# Altium PCB IBMExtender.PcbDoc (part 3 of 3)
Units mm, origin at the board's own origin, x right, y up, seen from the top; angles counter-clockwise.
Board outline 203.2 x 105.41 mm, 4 copper layers (F.Cu, In1.Cu, In2.Cu, B.Cu); 44 components, 158 nets, 598 pads, 425 vias.
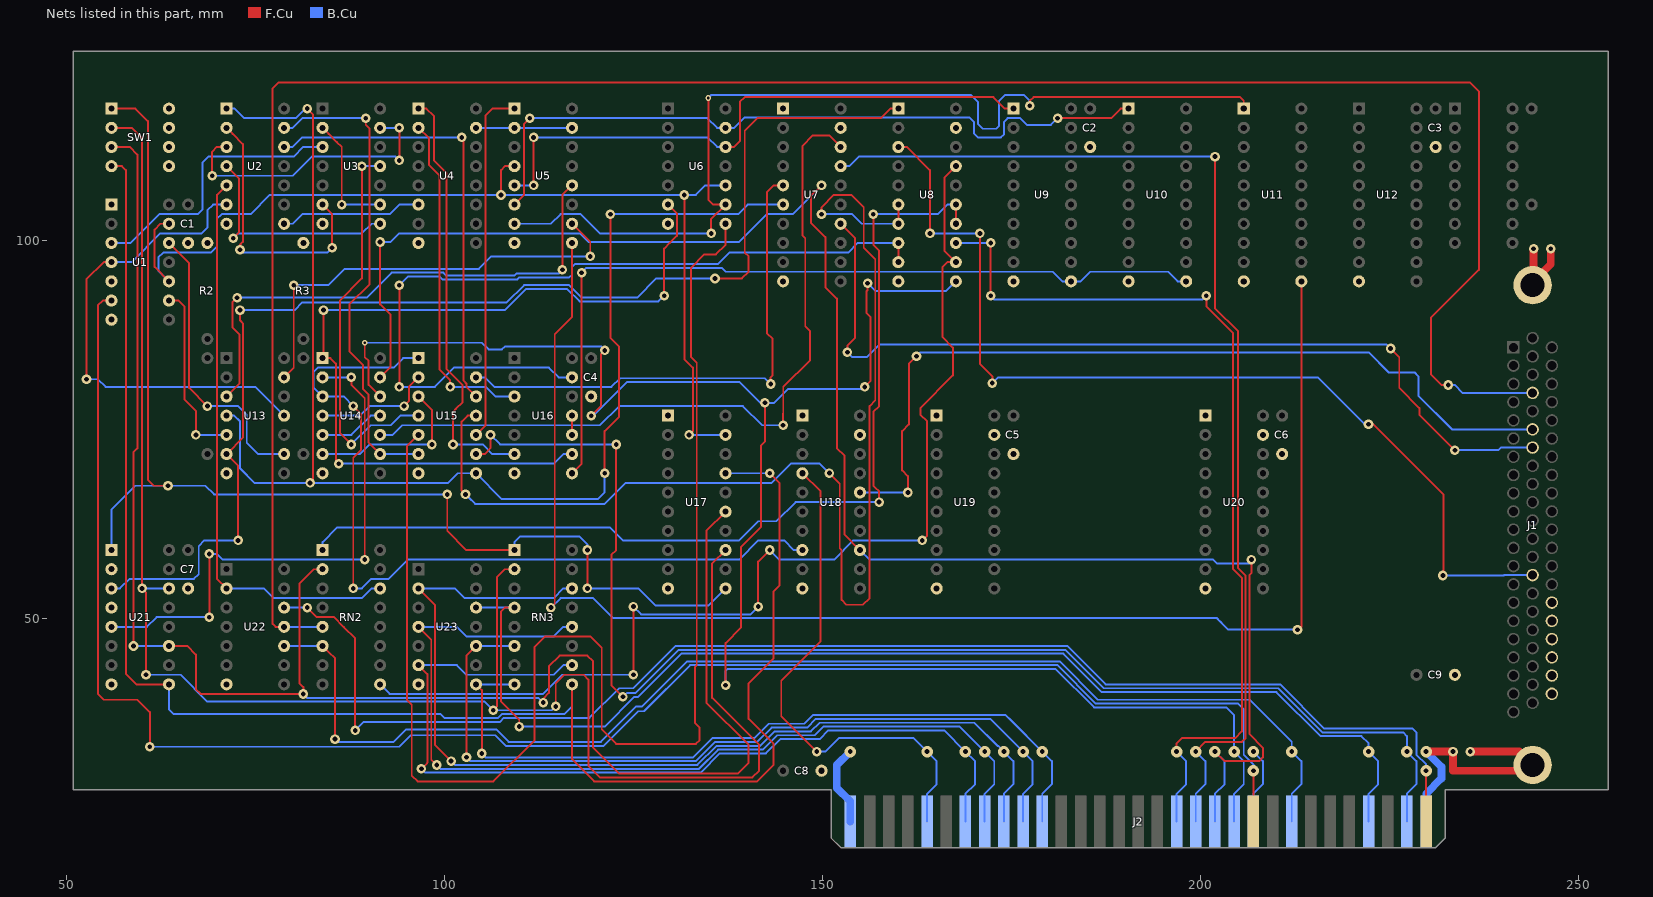
[diagram p5: the nets of this part, all layers, seen from the top]

## Via types
v1: diameter 1.27, hole 0.635, F.Cu to B.Cu, tented both sides, 360 vias
v2: diameter 1.524, hole 0.635, F.Cu to B.Cu, tented both sides, 62 vias
v3: diameter 0.762, hole 0.381, F.Cu to B.Cu, tented both sides, 3 vias

## Nets (pads, with @x,y where several pads share a name; then routed paths per layer and width w, separated by ;. In a path a pad name is that pad's centre, name@x,y a point inside that pad or via, vN(x,y) a via of type N, cw(c..) or ccw(c..) an arc to the next point about the centre after c; other vN are vias at no path point) (continued)
EMEMW#: J1.35 U8.3 | length 133.2
  F.Cu w0.254: U8.3@160.02,112.395 161.151,112.395 164.211,109.335 164.211,101.504 v1(164.211,100.965) ; v1(170.815,100.965) 170.815,83.702 171.227,83.29 172.466,82.051 v1(172.466,81.153) ; v1(222.25,75.692) 222.885,75.692 223.774,74.803 226.187,72.39 ; 224.409,74.168 226.187,72.39 ; v1(232.093,55.689) 232.093,56.228 232.156,56.292 232.156,66.421 226.187,72.39
  B.Cu w0.254: v1(164.211,100.965) 165.1,100.965 170.307,100.965 v1(170.815,100.965) ; v1(172.466,81.153) 173.228,81.915 ; v1@172.72,81.407 173.228,81.915 ; v1(222.25,75.692) 221.742,75.692 215.519,81.915 173.482,81.915 173.228,81.915 ; v1(232.093,55.689) 240.157,55.689 240.195,55.728 J1.35@243.967,55.728
ERESERVED: J1.25 RN2.5 U22.11 | length 292.5
  F.Cu w0.254: U22.11@78.74,48.895 77.609,48.895 77.216,49.288 77.216,120.142 77.978,120.904 235.712,120.904 236.855,119.761 236.855,96.139 230.505,89.789 230.505,82.296 231.902,80.899 v1(232.791,80.899)
  B.Cu w0.254: U22.11@78.74,48.895 RN2.5@83.82,48.895 ; v1(232.791,80.899) 233.68,80.899 234.747,79.832 J1.25@243.84,79.832
ERESET#: J1.28 U7.14 | length 119
  F.Cu w0.254: U7.14@152.4,102.235 154.305,100.33 154.305,87.249 154.305,87.131 153.289,86.115 v1(153.289,85.217) ; v1(225.171,85.725) 226.314,84.582 226.314,84.201 226.314,80.518 228.981,77.851 228.981,76.962 v1(233.68,72.263)
  B.Cu w0.254: v1(153.289,85.217) 153.924,84.582 154.305,84.582 155.829,84.582 157.48,86.233 223.52,86.233 ; 223.774,86.233 223.52,86.233 ; v1(225.171,85.725) 224.663,86.233 224.282,86.233 223.52,86.233 ; v1(233.68,72.263) 233.731,72.314 239.471,72.314 239.789,72.631 242.787,72.631 242.8,72.619 J1.28@243.967,72.619
ET/C: J1.27 U18.16 | length 112.8
  F.Cu w0.254: v1(161.29,66.675) 161.29,68.834 160.528,69.596 160.528,74.803 161.417,75.692 161.417,81.407 161.417,83.693 161.798,84.074 v1(162.433,84.709)
  B.Cu w0.254: U18.16@154.94,66.675 v1(161.29,66.675) ; v1(162.433,84.709) 162.941,85.217 222.25,85.217 224.917,82.55 228.346,82.55 228.854,82.042 228.854,79.477 233.325,75.006 J1.27@243.84,75.006
EXT_DISABLE: U8.1 U13.6 U21.3 | length 164.9
  F.Cu w0.254: v1(72.644,60.325) 72.644,70.231 72.517,70.358 U13.6@71.12,71.755 73.317,73.952 73.317,89.027 72.898,89.446 72.898,89.907 v1(72.898,90.805) ; v1(135.763,94.996) 139.319,94.996 140.208,95.885 140.208,97.917 139.7,98.425 139.7,114.554 141.351,116.205 157.696,116.205 158.966,117.475 U8.1@160.02,117.475
  B.Cu w0.254: U21.3@55.88,53.975 57.011,53.975 58.281,55.245 66.802,55.245 67.437,55.88 67.437,59.563 68.199,60.325 71.374,60.325 v1(72.644,60.325) ; v1(72.898,90.805) 80.137,90.805 81.153,91.821 108.204,91.821 110.49,94.107 116.459,94.107 118.11,92.456 125.476,92.456 128.016,94.996 v1(135.763,94.996)
GND: C1.2 C2.2 C3.2 C4.2 C5.2 C6.2 C7.2 C8.2 C9.2 J1.57 J1.58 J1.59 J1.60 J1.61 J1.62 J1.63 J2.1 J2.10 J2.31 R2.2 R3.2 SW1.5 SW1.6 SW1.7 SW1.8 U1.1 U1.5 U1.7 U2.7 U3.7 U4.8 U5.8 U6.7 U7.1 U7.10 U7.19 U8.10 U8.19 U9.10 U10.10 U11.10 U12.10 U13.7 U14.7 U15.7 U16.7 U17.1 U17.10 U18.1 U18.10 U18.19 U19.1 U19.10 U19.19 U20.1 U20.10 U20.19 U21.2 U21.4 U21.8 U22.7 U23.7 | length 68.7
  F.Cu w1.016: v2(229.87,32.385) v1(233.426,32.385) 233.426,29.845 243.205,29.845 J1.63@243.967,30.607 242.189,32.385 v1(235.712,32.385) ; v1(244.094,98.933) 244.094,94.234 J1.63@243.967,94.107 243.967,94.488 246.38,96.901 v1(246.38,98.933)
  B.Cu w0.254: J2.10@207.01,23.114 207.01,26.793 208.28,28.063 208.28,31.115 v2(207.01,32.385)
  B.Cu w1.016: J2.31@153.67,23.114 153.67,25.781 151.892,27.559 151.892,30.607 v2(153.67,32.385) ; J2.1@229.87,23.114 229.87,26.797 231.902,28.829 231.902,30.353 v2(229.87,32.385)
IOCHCK: J2.32 U22.12 | length 186.2
  F.Cu w0.254: v1(81.788,51.435) 83.058,50.165 85.344,50.165 86.645,48.864 88.138,47.371 v1(88.138,35.179) ; J2.32@229.87,23.114 v2(229.87,29.845)
  B.Cu w0.254: U22.12@78.74,51.435 v1(81.788,51.435) ; 88.646,35.687 v1(88.138,35.179) 89.281,36.322 107.315,36.322 107.823,36.83 115.316,36.83 119.126,36.83 123.063,40.767 124.968,40.767 130.556,46.355 182.372,46.355 187.452,41.275 210.566,41.275 216.408,35.433 228.092,35.433 228.6,34.925 228.6,31.963 229.87,30.693 v2(229.87,29.845)
IOCHRDY: J2.41 U1.6 | length 234.1
  F.Cu w0.254: U1.6@55.88,92.075 54.749,92.075 54.102,91.428 54.102,40.005 54.864,39.243 59.309,39.243 60.96,37.592 v1(60.96,33.02) ; J2.41@207.01,23.114 v2(207.01,29.845)
  B.Cu w0.254: v1(60.96,33.02) 93.98,33.02 95.504,34.544 106.68,34.544 108.077,33.147 121.031,33.147 125.603,37.719 126.365,37.719 132.461,43.815 143.3,43.815 143.763,43.815 181.102,43.815 186.182,38.735 204.978,38.735 205.74,37.973 205.74,31.963 207.01,30.693 v2(207.01,29.845)
IOR#: J2.14 U8.13 | length 122.4
  F.Cu w0.254: v1@172.212,99.695 v1(172.243,99.695) v1(172.243,92.71) ; v2(196.85,32.385) 196.85,33.463 197.55,34.163 204.597,34.163 205.486,35.052 205.486,55.372 204.343,56.515 204.343,87.757 202.057,90.043 ; v1@200.787,92.583 200.787,91.948 ; v1(200.787,92.71) 200.787,91.948 ; 201.422,90.678 202.057,90.043 ; 200.787,91.948 200.787,91.313 202.057,90.043
  B.Cu w0.254: U8.13@167.64,99.695 v1@172.212,99.695 ; v1@172.212,92.71 v1(172.243,92.71) 172.72,92.202 198.374,92.202 199.644,92.202 200.279,92.202 v1(200.787,92.71) ; J2.14@196.85,23.114 196.85,26.793 198.12,28.063 198.12,31.115 v2(196.85,32.385)
IOW#: J2.13 U7.17 | length 146.4
  F.Cu w0.254: v2(199.39,32.385) 200.66,33.655 205.486,33.655 205.994,34.163 205.994,55.626 204.978,56.642 204.978,88.011 201.93,91.059 v1(201.93,111.125)
  B.Cu w0.254: U7.17@152.4,109.855 153.531,109.855 154.801,111.125 v1(201.93,111.125) ; J2.13@199.39,23.114 199.39,26.793 200.66,28.063 200.66,31.115 v2(199.39,32.385)
IRQ2: J2.4 RN3.4 U23.12 | length 156
  F.Cu w0.254: RN3.4@109.22,51.435 107.95,51.435 107.442,50.927 107.442,38.989 109.855,36.576 109.855,36.585 v1(109.855,35.687)
  B.Cu w0.254: U23.12@104.14,51.435 105.271,51.435 RN3.4@109.22,51.435 ; v1(109.855,35.687) 121.031,35.687 121.138,35.687 125.075,39.624 125.603,39.624 131.318,45.339 181.864,45.339 186.944,40.259 210.058,40.259 215.9,34.417 221.296,34.417 222.25,33.463 v2(222.25,32.385) 223.52,31.115 223.52,28.063 222.25,26.793 J2.4@222.25,23.114
IRQ3: J2.25 RN3.10 U23.6 | length 122.6
  F.Cu w0.254: U23.6@96.52,43.815 97.701,42.634 97.701,30.899 97.663,30.861 v1(96.901,30.099)
  B.Cu w0.254: U23.6@96.52,43.815 101.6,43.815 102.87,42.545 114.439,42.545 115.709,43.815 RN3.10@116.84,43.815 ; v1@97.282,29.718 v1(96.901,30.099) 97.409,29.591 98.425,29.591 ; 98.596,29.591 98.425,29.591 ; 152.446,35.179 150.749,35.179 149.606,34.036 149.182,34.036 144.399,34.036 142.494,32.131 140.462,32.131 136.394,32.131 133.854,29.591 98.85,29.591 98.425,29.591 ; 152.446,35.179 166.116,35.179 v2(168.91,32.385) 170.18,31.115 170.18,28.063 168.91,26.793 J2.25@168.91,23.114
IRQ4: J2.24 RN3.12 U23.4 | length 127.4
  F.Cu w0.254: U23.4@96.52,48.895 98.171,47.244 98.209,47.206 98.209,31.331 v1(98.933,30.607)
  B.Cu w0.254: U23.4@96.52,48.895 101.6,48.895 102.87,47.625 112.268,47.625 114.439,47.625 115.709,48.895 RN3.12@116.84,48.895 ; v1(98.933,30.607) 99.441,30.099 133.644,30.099 136.184,32.639 140.252,32.639 142.113,32.639 144.018,34.544 148.971,34.544 150.114,35.687 152.236,35.687 ; 152.236,35.687 168.148,35.687 v2(171.45,32.385) 172.72,31.115 172.72,28.063 171.45,26.793 J2.24@171.45,23.114
IRQ5: J2.23 RN3.14 U23.2 | length 133.6
  F.Cu w0.254: U23.2@96.52,53.975 98.552,51.943 98.717,51.778 98.717,33.236 v1(100.838,31.115)
  B.Cu w0.254: U23.2@96.52,53.975 101.346,53.975 102.616,52.705 110.998,52.705 114.439,52.705 115.709,53.975 RN3.14@116.84,53.975 ; v1(100.838,31.115) 101.346,30.607 133.433,30.607 135.973,33.147 141.732,33.147 143.637,35.052 148.463,35.052 149.606,36.195 152.025,36.195 170.101,36.195 173.149,33.147 173.228,33.147 v2(173.99,32.385) 175.26,31.115 175.26,28.063 173.99,26.793 J2.23@173.99,23.114
IRQ6: J2.22 RN3.6 U23.10 | length 108.8
  F.Cu w0.254: v1(102.87,31.623) 102.87,45.085 103.251,45.466 U23.10@104.14,46.355
  B.Cu w0.254: v1(102.87,31.623) 103.378,31.115 133.223,31.115 135.763,33.655 141.351,33.655 143.256,35.56 147.955,35.56 149.098,36.703 149.606,36.703 ; U23.10@104.14,46.355 105.271,46.355 RN3.6@109.22,46.355 ; 149.401,36.703 149.606,36.703 ; 151.765,36.703 149.606,36.703 ; 151.815,36.703 172.212,36.703 v2(176.53,32.385) 177.8,31.115 177.8,28.063 176.53,26.793 J2.22@176.53,23.114
IRQ7: J2.21 RN3.8 U23.8 | length 111.7
  F.Cu w0.254: U23.8@104.14,41.275 104.902,40.513 v1(104.902,32.131)
  B.Cu w0.254: U23.8@104.14,41.275 108.089,41.275 RN3.8@109.22,41.275 ; v1(104.902,32.131) 105.41,31.623 132.461,31.623 132.882,31.623 133.136,31.877 ; 132.969,31.71 133.136,31.877 ; 151.604,37.211 148.696,37.211 147.554,36.068 142.875,36.068 140.97,34.163 135.422,34.163 133.136,31.877 ; 151.605,37.211 174.244,37.211 ; J2.21@179.07,23.114 179.07,26.797 180.34,28.067 180.34,31.115 v2(179.07,32.385) ; 174.244,37.211 175.006,36.449 ; 174.244,37.211 175.006,36.449 ; 174.244,37.211 v2(179.07,32.385) ; 175.006,36.449 v2(179.07,32.385)
LOCAL_DIR: U6.8 U15.5 | length 183.9
  F.Cu w0.254: U15.5@96.52,74.295 94.996,72.771 94.996,39.243 95.631,38.608 95.631,29.21 96.393,28.448 106.426,28.448 111.887,33.909 111.887,46.228 113.284,47.625 115.316,47.625 ; 115.189,47.625 115.316,47.625 ; U6.8@137.16,102.235 137.16,99.441 135.89,98.171 134.366,98.171 132.588,96.393 132.588,84.582 133.35,83.82 133.35,74.783 133.35,71.247 133.35,43.811 133.096,43.557 133.096,36.195 133.731,35.56 133.731,33.909 133.223,33.401 122.682,33.401 120.777,35.306 120.777,46.101 119.253,47.625 115.316,47.625
MEM_IN_EXP: U14.3 U15.1 U18.8 | length 110.8
  F.Cu w0.254: v1(87.884,53.975) 87.884,54.737 ; 87.884,54.61 87.884,54.737 ; v1(87.884,78.105) 88.9,77.089 88.9,72.263 87.884,71.247 87.884,54.737
  B.Cu w0.254: 86.487,79.375 86.36,79.375 ; v1(87.884,53.975) 88.519,53.975 89.027,53.975 90.297,55.245 92.583,55.245 95.123,57.785 138.938,57.785 141.478,60.325 144.919,60.325 146.189,59.055 U18.8@147.32,59.055 ; v1(87.884,78.105) 86.614,79.375 86.36,79.375 ; U15.1@96.52,84.455 94.488,84.455 93.218,83.185 83.185,83.185 82.639,82.639 82.639,80.556 U14.3@83.82,79.375 86.36,79.375
MEMR#: J2.12 U14.13 U18.13 | length 230.5
  F.Cu w0.254: U14.13@91.44,81.915 92.837,83.312 92.837,90.17 91.44,91.567 v1(91.44,99.822) ; v1(149.86,107.315) 148.463,105.918 148.463,102.362 150.368,100.457 150.368,93.853 151.892,92.329 151.892,72.517 152.908,71.501 152.908,61.087 U18.13@154.94,59.055 ; v2(201.93,32.385) 203.2,31.115 207.772,31.115 208.28,31.623 208.28,32.893 206.502,34.671 206.502,55.753 206.756,56.007 v1(206.756,57.785)
  B.Cu w0.254: v1(91.44,99.822) 92.837,99.822 93.98,100.965 100.584,100.965 ; 100.711,100.965 100.584,100.965 ; v1(149.86,107.315) 146.05,103.505 142.621,103.505 138.938,99.822 118.999,99.822 117.856,100.965 100.584,100.965 ; U18.13@154.94,59.055 156.21,57.785 201.676,57.785 202.184,57.277 206.502,57.277 206.756,57.531 v1(206.756,57.785) ; J2.12@201.93,23.114 201.93,26.793 203.2,28.063 203.2,31.115 v2(201.93,32.385)
MEMW#: J2.11 U8.11 U14.12 | length 246.6
  F.Cu w0.254: v3(89.408,86.487) 89.408,84.582 89.916,84.074 89.916,80.899 U14.12@91.44,79.375 ; v1(119.38,76.835) 120.65,78.105 120.65,84.963 v1(121.158,85.471) v1@121.158,85.598 ; v1(137.16,41.148) 137.16,46.736 139.192,48.768 139.192,59.436 141.859,62.103 141.859,72.898 142.367,73.406 142.367,77.089 ; 142.367,77.343 142.367,77.089 ; v1(142.367,78.537) 142.367,77.495 142.367,77.089 ; v1(155.575,80.645) 156.337,81.407 156.337,89.916 155.829,90.424 155.829,93.336 155.956,93.463 v1(155.956,94.361)
  B.Cu w0.254: v3(89.408,86.487) 96.647,86.487 ; 96.52,86.487 96.647,86.487 ; v1(119.38,76.835) 119.634,76.835 124.079,81.28 139.031,81.28 141.774,78.537 142.672,78.537 143.57,78.537 ; v1@121.158,85.598 120.777,85.979 107.95,85.979 107.569,85.598 105.791,85.598 104.902,86.487 96.647,86.487 ; v1(137.16,41.148) 137.16,42.164 137.16,43.053 137.414,43.307 142.367,43.307 ; 141.859,43.307 142.367,43.307 ; v1(142.367,78.537) 143.57,78.537 ; 144.145,43.307 144.399,43.307 ; 145.034,43.307 145.923,43.307 ; v1(155.575,80.645) 155.321,80.391 145.424,80.391 143.57,78.537 ; v1(155.956,94.361) 156.972,93.345 166.37,93.345 U8.11@167.64,94.615 ; J2.11@204.47,23.114 204.47,26.793 205.74,28.063 205.74,31.115 v2(204.47,32.385) 204.47,37.211 203.454,38.227 185.928,38.227 180.848,43.307 145.923,43.307 ; 142.367,43.307 143.09,43.307 143.762,43.307 144.399,43.307 ; 144.399,43.307 145.923,43.307
Net-(RN2-Pad1): RN2.1 U8.14 U8.15 | length 131.5
  F.Cu w0.254: v1(156.718,103.505) 156.718,99.441 157.48,98.679 157.48,78.105 156.718,77.343 156.718,67.564 156.972,67.31 157.48,66.802 v1(157.48,65.405) ; U8.14@167.64,102.235 167.64,103.366 U8.15@167.64,104.775
  B.Cu w0.254: RN2.1@83.82,59.055 83.82,60.109 85.725,62.014 121.882,62.014 123.571,60.325 132.842,60.325 ; 132.969,60.325 132.842,60.325 ; v1(156.718,103.505) 165.239,103.505 166.509,104.775 U8.15@167.64,104.775 ; v1(157.48,65.405) 156.972,65.405 146.431,65.405 143.891,62.865 141.478,62.865 138.938,60.325 132.842,60.325
Net-(RN2-Pad2): RN2.2 SW1.3 U17.15 U21.11 | length 231
  F.Cu w0.254: SW1.3@55.88,112.395 58.293,112.395 59.309,111.379 59.309,72.517 58.801,72.009 58.801,70.485 ; v1(58.801,46.355) 58.801,49.784 58.801,70.485 ; 58.801,71.247 58.801,70.485 ; U21.11@63.5,46.355 65.913,46.355 67.056,45.212 67.056,40.64 67.691,40.005 v1(81.28,40.005) 81.28,40.903 80.772,41.411 80.772,54.598 82.689,56.515 RN2.2@83.82,56.515 ; v1(113.03,38.862) 113.03,39.379 113.792,40.141 113.792,43.688 115.189,45.085 118.872,45.085 119.634,44.323 119.634,32.893 123.063,29.464 138.791,29.464 140.208,30.881 140.208,33.274 134.62,38.862 134.62,61.595 U17.15@137.16,64.135
  B.Cu w0.254: v1(58.801,46.355) 58.928,46.355 U21.11@63.5,46.355 ; v1(81.28,40.005) 81.788,39.497 112.014,39.497 112.395,39.497 v1(113.03,38.862)
Net-(RN2-Pad9): RN2.9 U8.12 U8.17 | length 150.1
  F.Cu w0.254: v1(124.968,42.545) 124.968,50.029 ; 124.968,50.927 124.968,50.029 ; v1(124.968,51.562) 124.968,50.029 ; v1(141.478,51.562) 141.478,52.324 ; v1@141.478,51.943 141.478,52.324 ; v1(143.002,59.055) 141.478,57.531 141.478,52.324 ; v1(163.195,60.325) 163.83,60.96 163.83,61.214 163.83,76.073 162.941,76.962 162.941,77.851 167.259,82.169 167.259,85.852 165.862,87.249 165.862,96.508 166.509,97.155 U8.12@167.64,97.155 166.116,98.679 166.116,108.331 166.37,108.585 U8.17@167.64,109.855
  B.Cu w0.254: RN2.9@91.44,41.275 92.71,40.005 113.03,40.005 115.57,42.545 122.936,42.545 v1(124.968,42.545) ; v1(124.968,51.562) 125.984,50.546 127.552,50.546 139.827,50.546 140.462,50.546 v1(141.478,51.562) ; v1(143.002,59.055) 144.272,57.785 151.511,57.785 154.051,60.325 154.462,60.325 160.655,60.325 ; v1@162.941,60.325 160.655,60.325 ; v1(163.195,60.325) 160.655,60.325
Net-(RN2-Pad14): RN2.14 U2.5 U22.2 | length 75.8
  F.Cu w0.254: U22.2@71.12,53.975 69.85,55.245 69.85,106.045 69.939,106.134 U2.5@71.12,107.315
  B.Cu w0.254: U22.2@71.12,53.975 76.073,53.975 77.343,52.705 89.039,52.705 90.309,53.975 RN2.14@91.44,53.975
Net-(RN3-Pad1): RN3.1 SW1.1 U17.11 U21.1 | length 160.3
  F.Cu w0.254: SW1.1@55.88,117.475 59.055,117.475 60.706,115.824 60.706,68.326 61.468,67.564 v1(63.373,67.564) ; v1@100.33,66.04 100.33,65.532 ; v1(100.33,66.421) 100.33,65.532 ; RN3.1@109.22,59.055 102.87,59.055 100.33,61.595 100.33,65.532 ; v1(118.872,53.975) v1(118.872,59.055)
  B.Cu w0.254: U21.1@55.88,59.055 55.88,64.389 59.055,67.564 v1(63.373,67.564) 68.326,67.564 69.469,66.421 v1(100.33,66.421) ; RN3.1@109.22,59.055 109.22,60.109 109.944,60.833 117.856,60.833 118.872,59.817 v1(118.872,59.055) ; v1(118.872,53.975) 125.603,53.975 127.889,51.689 134.874,51.689 U17.11@137.16,53.975
Net-(RN3-Pad2): RN3.2 SW1.2 U17.13 U21.14 | length 232.8
  F.Cu w0.254: SW1.2@55.88,114.935 58.547,114.935 59.944,113.538 59.944,112.002 59.944,57.658 ; 59.944,57.531 59.944,57.658 ; v1(60.452,42.545) 60.452,53.467 v1(59.944,53.975) 59.944,57.658 ; v1(106.426,37.846) 106.934,38.354 106.934,39.506 106.934,40.513 106.934,55.499 107.95,56.515 RN3.2@109.22,56.515 ; v1(114.681,38.354) 114.681,41.402 115.824,42.545 118.364,42.545 118.999,41.91 118.999,30.48 120.523,28.956 140.716,28.956 141.605,29.845 141.605,33.274 135.382,39.497 135.382,57.277 U17.13@137.16,59.055
  B.Cu w0.254: v1(59.944,53.975) U21.14@63.5,53.975 ; v1(60.452,42.545) 65.024,42.545 68.58,38.989 103.759,38.989 105.283,38.989 v1(106.426,37.846) 108.204,37.846 ; 107.578,37.846 108.204,37.846 ; v1(114.681,38.354) 114.173,37.846 113.792,37.846 108.204,37.846
Net-(RN3-Pad9): RN3.9 SW1.4 U17.17 U21.9 | length 223.2
  F.Cu w0.254: SW1.4@55.88,109.855 57.277,109.855 57.785,109.347 57.785,42.672 59.182,41.275 U21.9@63.5,41.275 ; RN3.9@116.84,41.275 116.84,31.369 119.761,28.448 139.319,28.448 141.351,28.448 143.51,30.607 143.51,33.401 140.208,36.703 140.208,41.402 143.51,44.704 143.51,53.594 144.272,54.356 144.272,65.278 ; v1(143.002,69.215) 144.272,67.945 144.272,65.278 ; 144.272,65.913 144.272,65.278
  B.Cu w0.254: U21.9@63.5,41.275 63.5,39.624 63.5,37.973 64.135,37.338 99.441,37.338 99.949,36.83 107.061,36.83 107.569,37.338 115.824,37.338 116.84,38.354 RN3.9@116.84,41.275 ; U17.17@137.16,69.215 142.113,69.215 ; 142.24,69.215 142.113,69.215 ; v1(143.002,69.215) 142.113,69.215
Net-(U1-Pad3): U1.3 U3.3 | length 36.8
  B.Cu w0.254: U1.3@55.88,99.695 58.42,99.695 62.23,103.505 67.31,103.505 67.945,104.14 67.945,110.363 68.707,111.125 80.01,111.125 81.28,112.395 U3.3@83.82,112.395
Net-(U1-Pad4): U1.4 U2.6 U13.11 | length 65.4
  F.Cu w0.254: v1(52.578,81.661) 52.578,94.869 54.864,97.155 U1.4@55.88,97.155
  B.Cu w0.254: v1(52.578,81.661) 54.102,81.661 55.118,80.645 59.69,80.645 74.93,80.645 U13.11@78.74,76.835 ; U1.4@55.88,97.155 58.547,97.155 62.357,100.965 67.818,100.965 68.58,101.727 68.58,104.013 69.342,104.775 U2.6@71.12,104.775
Net-(U1-Pad9): U1.9 U13.5 | length 24.1
  F.Cu w0.254: U1.9@63.5,92.075 64.77,92.075 65.532,91.313 65.532,78.994 67.056,77.47 v1(67.056,74.295)
  B.Cu w0.254: v1(67.056,74.295) 67.564,74.295 69.989,74.295 U13.5@71.12,74.295
Net-(U1-Pad12): U1.12 U13.9 | length 39.4
  F.Cu w0.254: U1.12@63.5,99.695 66.167,97.028 66.167,80.518 v1(68.58,78.105)
  B.Cu w0.254: v1(68.58,78.105) 69.596,78.105 ; v1@68.834,78.105 69.596,78.105 ; U13.9@78.74,71.755 75.311,71.755 73.787,73.279 73.787,76.962 72.644,78.105 71.12,78.105 69.596,78.105
Net-(U2-Pad2): U2.2 U3.6 | length 37.2
  F.Cu w0.254: U2.2@71.12,114.935 71.92,114.135 73.279,112.776 73.279,99.822 72.898,99.441 v1(72.898,98.806) ; U3.6@83.82,104.775 85.09,103.505 85.09,99.441 v1(85.09,99.06)
  B.Cu w0.254: v1(72.898,98.806) 73.279,98.425 74.295,98.425 ; 73.914,98.425 74.295,98.425 ; 74.676,98.425 75.184,98.425 ; 84.201,98.425 83.947,98.425 ; v1(85.09,99.06) 84.455,98.425 83.947,98.425 ; 74.295,98.425 75.184,98.425 ; 75.184,98.425 83.947,98.425
Net-(U2-Pad3): U2.3 U3.13 | length 39.5
  F.Cu w0.254: v1(69.215,108.585) 69.215,111.76 69.85,112.395 U2.3@71.12,112.395 ; v1(93.98,110.617) v1(93.98,114.935)
  B.Cu w0.254: v1(69.215,108.585) 78.232,108.585 79.883,108.585 82.423,111.125 92.329,111.125 ; U3.13@91.44,114.935 92.964,114.935 ; 92.964,111.125 92.71,111.125 92.329,111.125 ; v1@93.599,114.935 92.964,114.935 ; v1(93.98,110.617) 93.472,111.125 92.329,111.125 ; v1(93.98,114.935) 92.964,114.935
Net-(U2-Pad4): U2.4 U3.8 | length 30.7
  F.Cu w0.254: U2.4@71.12,109.855 72.771,108.204 72.771,101.092 v1(72.009,100.33)
  B.Cu w0.254: v1(72.009,100.33) 72.644,100.965 76.708,100.965 89.039,100.965 90.309,102.235 U3.8@91.44,102.235
Net-(U2-Pad8): U2.8 U4.6 | length 18.8
  B.Cu w0.254: U2.8@78.74,102.235 79.871,102.235 81.141,103.505 92.71,103.505 93.98,104.775 U4.6@96.52,104.775
Net-(U3-Pad2): U3.2 U3.9 | length 16.3
  F.Cu w0.254: U3.2@83.82,114.935 84.62,114.135 85.725,113.03 86.36,112.395 v1(86.36,104.775)
  B.Cu w0.254: v1(86.36,104.775) U3.9@91.44,104.775
Net-(U4-Pad15): U4.15 U5.2 U5.15 | length 12.7
  B.Cu w0.254: U4.15@104.14,114.935 U5.2@109.22,114.935 U5.15@116.84,114.935
Net-(U5-Pad5): U5.5 U6.12 U9.1 | length 79.8
  F.Cu w0.254: v1(111.76,107.315) 111.76,108.213 v1(111.76,113.665) ; U6.12@137.16,112.395 138.291,112.395 139.065,113.169 139.065,118.364 139.7,118.999 172.593,118.999 174.117,117.475 U9.1@175.26,117.475
  B.Cu w0.254: U5.5@109.22,107.315 v1(111.76,107.315) ; v1(111.76,113.665) 112.776,113.665 ; v1@112.268,113.665 112.776,113.665 ; U6.12@137.16,112.395 136.029,112.395 134.759,113.665 112.903,113.665 112.776,113.665
Net-(U10-Pad1): U5.6 U6.13 U10.1 | length 99.7
  F.Cu w0.254: U5.6@109.22,104.775 110.49,106.045 110.49,113.665 110.49,114.046 ; 110.49,114.935 110.49,114.046 ; v1(111.252,116.205) 110.49,115.443 110.49,114.046 ; v1(181.102,116.205) 188.176,116.205 189.446,117.475 U10.1@190.5,117.475
  B.Cu w0.254: v1(111.252,116.205) 112.522,116.205 ; v1@111.633,116.205 111.76,116.205 112.522,116.205 ; v1(181.102,116.205) 180.213,115.316 177.038,115.316 176.149,116.205 174.498,116.205 173.99,115.697 173.99,114.046 173.609,113.665 170.561,113.665 170.053,114.173 170.053,115.697 169.456,116.294 139.65,116.294 138.291,114.935 U6.13@137.16,114.935 136.029,114.935 134.759,116.205 132.461,116.205 112.522,116.205
Net-(U10-Pad11): U9.11 U10.11 U16.8 | length 109.4
  F.Cu w0.254: U16.8@116.84,69.215 118.11,70.485 118.11,93.091 ; 118.11,93.345 118.11,93.091 ; v1(118.11,95.758) 118.11,93.091
  B.Cu w0.254: v1(118.11,95.758) 118.745,96.393 136.652,96.393 137.16,95.885 138.049,95.885 180.479,95.885 181.749,94.615 U9.11@182.88,94.615 184.15,94.615 185.42,95.885 195.719,95.885 196.989,94.615 U10.11@198.12,94.615
Net-(U11-Pad1): U5.7 U6.9 U11.1 | length 129.6
  F.Cu w0.254: v3(134.874,118.872) 134.874,105.41 135.509,104.775 U6.9@137.16,104.775 135.255,102.87 v1(135.255,100.965) ; v1(177.419,117.856) 177.419,118.491 177.927,118.999 205.27,118.999 205.74,118.529 U11.1@205.74,117.475
  B.Cu w0.254: U5.7@109.22,102.235 114.046,102.235 115.316,103.505 117.983,103.505 120.523,100.965 v1(135.255,100.965) ; v3(134.874,118.872) 135.255,119.253 169.672,119.253 170.561,118.364 170.561,115.443 171.196,114.808 172.974,114.808 173.355,115.189 173.355,118.491 174.117,119.253 176.657,119.253 177.419,118.491 v1(177.419,117.856)
Net-(U11-Pad11): U5.9 U11.11 | length 198.4
  F.Cu w0.254: v1(114.046,51.435) 114.554,51.943 114.554,53.594 ; 114.554,52.736 114.554,53.594 ; U5.9@116.84,99.695 116.84,89.916 114.554,87.63 114.554,53.594 ; v1(212.852,48.514) 212.979,48.514 213.36,48.895 213.36,49.911 213.36,57.15 213.36,65.278 213.36,83.903 213.36,93.484 U11.11@213.36,94.615
  B.Cu w0.254: v1(114.046,51.435) 115.316,52.705 119.634,52.705 122.301,50.038 202.184,50.038 202.311,49.911 ; 202.819,49.403 202.311,49.911 ; v1(212.852,48.514) 203.708,48.514 202.311,49.911
Net-(U13-Pad3): U5.12 U13.3 | length 73.1
  F.Cu w0.254: U13.3@71.12,79.375 72.809,81.064 72.809,87.592 71.882,88.519 71.882,90.424 ; 71.882,91.44 71.882,90.932 71.882,90.805 71.882,90.424 ; v1(72.517,92.456) 71.882,91.821 71.882,90.424 ; v1(115.57,96.139) 115.57,106.045 U5.12@116.84,107.315
  B.Cu w0.254: v1(72.517,92.456) 89.662,92.456 92.964,95.758 99.822,95.758 100.203,95.377 109.22,95.377 109.474,95.631 113.284,95.631 ; 114.3,95.631 113.284,95.631 ; v1(115.57,96.139) 115.062,95.631 113.284,95.631
Net-(U14-Pad2): U14.2 U21.5 | length 73.1
  F.Cu w0.254: v1(68.834,50.165) v1(68.834,58.547) ; v1(87.63,81.915) 87.63,80.899 87.757,80.772 89.408,79.121 ; 88.519,80.01 89.408,79.121 ; v1(89.408,57.785) 89.408,79.121
  B.Cu w0.254: U21.5@55.88,48.895 60.579,48.895 61.849,50.165 v1(68.834,50.165) ; v1(68.834,58.547) 69.85,58.547 70.612,57.785 72.517,57.785 85.09,57.785 v1(89.408,57.785) ; U14.2@83.82,81.915 86.614,81.915 86.868,81.915 ; v1@87.249,81.915 86.868,81.915 ; v1(87.63,81.915) 86.868,81.915
Net-(U14-Pad4): U14.4 U15.2 | length 15.9
  F.Cu w0.254: v1(94.615,78.105) 95.25,78.74 95.25,80.645 U15.2@96.52,81.915
  B.Cu w0.254: U14.4@83.82,76.835 88.773,76.835 90.043,78.105 v1(94.615,78.105)
Net-(U14-Pad6): U14.6 U15.3 | length 22.1
  F.Cu w0.254: U15.3@96.52,79.375 98.298,77.597 v1(98.298,73.025)
  B.Cu w0.254: U14.6@83.82,71.755 88.773,71.755 90.043,73.025 v1(98.298,73.025)
Net-(U14-Pad9): U2.13 U14.9 U15.6 | length 63.8
  F.Cu w0.254: v1(89.535,116.205) 89.535,115.307 90.043,114.799 90.043,94.234 87.376,91.567 87.376,85.344 89.154,83.566 89.154,80.391 89.916,79.629 89.916,73.279 U14.9@91.44,71.755
  B.Cu w0.254: U2.13@78.74,114.935 79.871,114.935 81.141,116.205 v1(89.535,116.205) ; U14.9@91.44,71.755 92.571,71.755 U15.6@96.52,71.755
Net-(U14-Pad10): U7.18 U14.10 | length 101.1
  F.Cu w0.254: v1(144.78,75.565) 144.78,77.161 144.795,77.176 144.795,80.66 148.336,84.201 148.336,88.011 147.701,88.646 147.701,100.33 147.32,100.711 147.32,112.522 148.717,113.919 150.876,113.919 U7.18@152.4,112.395
  B.Cu w0.254: U14.10@91.44,74.295 93.091,74.295 94.361,75.565 120.523,75.565 123.063,78.105 139.446,78.105 141.986,75.565 v1(144.78,75.565)
Net-(U14-Pad11): U14.5 U14.11 | length 8.7
  B.Cu w0.254: U14.5@83.82,74.295 87.63,74.295 90.17,76.835 U14.11@91.44,76.835
Net-(U15-Pad4): U3.11 U15.4 | length 51.6
  F.Cu w0.254: v1(87.63,73.025) 86.106,74.549 86.106,92.075 89.027,94.996 v1(89.027,109.855)
  B.Cu w0.254: v1(87.63,73.025) 90.17,75.565 90.424,75.565 92.837,75.565 94.107,76.835 U15.4@96.52,76.835 ; v1(89.027,109.855) U3.11@91.44,109.855
Net-(U15-Pad10): U5.1 U15.10 | length 47
  F.Cu w0.254: U15.10@104.14,74.295 105.41,75.565 105.41,116.586 106.299,117.475 U5.1@109.22,117.475
Net-(U15-Pad12): U2.12 U15.12 | length 59.1
  F.Cu w0.254: v1(102.235,113.665) 102.489,113.411 102.489,81.475 102.87,81.094 102.87,80.645 U15.12@104.14,79.375
  B.Cu w0.254: U2.12@78.74,112.395 79.871,112.395 81.141,113.665 96.139,113.665 101.6,113.665 v1(102.235,113.665)
Net-(U15-Pad13): U7.5 U15.13 | length 69
  F.Cu w0.254: v1(143.129,81.026) 143.129,81.924 143.383,82.178 143.383,83.058 ; 143.383,82.677 143.383,83.058 ; U7.5@144.78,107.315 143.51,107.315 142.621,106.426 142.621,87.757 143.383,86.995 143.383,83.058
  B.Cu w0.254: U15.13@104.14,81.915 105.271,81.915 106.541,80.645 122.047,80.645 123.19,81.788 142.367,81.788 v1(143.129,81.026)
Net-(U16-Pad3): U4.2 U16.3 | length 45.4
  F.Cu w0.254: U4.2@96.52,114.935 97.917,113.538 97.917,109.982 99.314,108.585 99.314,83.439 99.314,82.94 100.711,81.543 v1(100.711,80.645)
  B.Cu w0.254: v1(100.711,80.645) 101.854,80.645 ; 101.473,80.645 101.854,80.645 ; U16.3@109.22,79.375 106.68,79.375 105.41,80.645 101.854,80.645
Net-(U16-Pad6): U4.1 U16.6 | length 57.4
  F.Cu w0.254: U4.1@96.52,117.475 97.574,117.475 98.552,116.497 98.552,110.617 100.203,108.966 100.203,83.043 102.362,80.884 102.362,78.613 101.473,77.724 ; v1(101.092,73.025) 101.092,77.343 101.473,77.724 ; 101.346,77.597 101.473,77.724
  B.Cu w0.254: v1(101.092,73.025) 101.854,73.025 ; v1@101.346,73.025 101.854,73.025 ; U16.6@109.22,71.755 108.089,71.755 106.426,71.755 106.299,71.755 105.029,73.025 101.854,73.025
Net-(U16-Pad10): U16.10 U16.11 | length 2.5
  F.Cu w0.254: U16.10@116.84,74.295 116.84,75.426 U16.11@116.84,76.835
PIOR#: U8.6 U8.7 U15.11 | length 160.2
  F.Cu w0.254: v1(102.743,66.421) 102.235,66.929 102.235,67.564 102.235,76.061 103.009,76.835 U15.11@104.14,76.835 ; v1(149.86,103.505) 149.86,104.403 151.502,106.045 153.812,106.045 155.448,104.409 155.448,99.06 156.972,97.536 156.972,78.867 156.21,78.105 156.21,52.72 156.225,52.705 155.336,51.816 153.162,51.816 152.527,52.451 152.527,59.055 152.273,59.309 152.273,67.818 v1(150.896,69.235) v1@150.876,69.215 ; U8.7@160.02,102.235 160.02,103.644 U8.6@160.02,104.775
  B.Cu w0.254: 103.505,65.659 v1(102.743,66.421) 104.013,65.151 121.158,65.151 123.952,67.945 143.256,67.945 145.796,70.485 149.606,70.485 v1@150.876,69.215 ; v1@149.733,103.505 v1(149.86,103.505) 151.257,103.505 153.924,103.505 155.194,102.235 U8.7@160.02,102.235
PMEMW#: U8.8 U8.9 U16.13 | length 110.2
  F.Cu w0.254: v1(93.98,80.645) 93.98,81.543 93.98,90.932 93.98,92.964 v1(93.98,94.107) ; U8.9@160.02,97.155 160.02,98.564 U8.8@160.02,99.695
  B.Cu w0.254: v1(93.98,80.645) 98.679,80.645 101.219,83.185 102.616,83.185 113.792,83.185 115.062,81.915 115.709,81.915 U16.13@116.84,81.915 ; v1(93.98,94.107) 95.123,95.25 96.012,95.25 96.774,95.25 ; 96.266,95.25 96.774,95.25 ; U8.8@160.02,99.695 154.686,99.695 153.416,98.425 137.668,98.425 136.144,96.901 117.221,96.901 116.84,96.52 116.84,95.504 116.459,95.123 109.855,95.123 109.601,94.869 99.695,94.869 99.314,95.25 96.774,95.25
PORT_211#: U5.10 U13.13 | length 59.2
  F.Cu w0.254: U13.13@78.74,81.915 80.01,83.185 80.01,84.074 v1(80.01,94.107) ; U5.10@116.84,102.235 119.253,99.822 v1(119.253,97.917)
  B.Cu w0.254: v1(80.01,94.107) 84.582,94.107 86.741,96.266 104.521,96.266 106.172,97.917 117.729,97.917 ; 118.066,97.917 117.729,97.917 ; v1(119.253,97.917) 117.729,97.917
READ_STATUS#: U1.10 U1.13 U5.4 U6.10 U17.19 | length 137.8
  F.Cu w0.254: U1.10@63.5,94.615 61.595,96.52 61.595,101.461 62.369,102.235 U1.13@63.5,102.235 ; v1(107.442,106.045) 107.442,109.347 107.95,109.855 108.089,109.855 U5.4@109.22,109.855 ; 131.699,100.203 131.699,100.711 ; v1(131.699,106.045) 131.699,100.711 ; v1(132.334,74.295) 132.842,74.803 132.842,83.185 131.699,84.328 131.699,100.711
  B.Cu w0.254: U1.10@63.5,94.615 62.103,96.012 62.103,97.79 62.738,98.425 69.058,98.425 69.85,99.217 69.85,102.87 70.485,103.505 74.295,103.505 76.835,106.045 106.426,106.045 v1(107.442,106.045) v1(131.699,106.045) 133.223,106.045 134.493,107.315 U6.10@137.16,107.315 ; v1(132.334,74.295) 136.029,74.295 U17.19@137.16,74.295
RESERVED: J2.8 RN2.6 U22.10 | length 166.9
  F.Cu w0.254: RN2.6@83.82,46.355 84.62,45.555 85.471,44.704 v1(85.471,34.036)
  B.Cu w0.254: U22.10@78.74,46.355 RN2.6@83.82,46.355 ; v1(85.471,34.036) 85.852,33.655 93.218,33.655 94.869,35.306 106.807,35.306 108.458,33.655 120.65,33.655 125.349,38.354 126.111,38.354 132.08,44.323 141.732,44.323 143.764,44.323 ; 143.51,44.323 143.764,44.323 ; J2.8@212.09,23.114 212.09,26.793 213.36,28.063 213.36,31.115 v2(212.09,32.385) 212.09,33.655 206.502,39.243 186.436,39.243 181.356,44.323 143.764,44.323
RESET: J2.2 U15.9 | length 178.9
  F.Cu w0.254: U15.9@104.14,71.755 105.271,71.755 106.045,72.529 v1(106.045,74.295) ; v1(122.682,73.025) 122.682,59.055 122.047,58.42 122.047,42.291 122.047,41.148 v1(123.571,39.624)
  B.Cu w0.254: v1(106.045,74.295) 107.315,73.025 v1(122.682,73.025) ; v1(123.571,39.624) 124.079,40.132 125.222,40.132 130.937,45.847 182.118,45.847 187.198,40.767 210.312,40.767 216.154,34.925 226.822,34.925 227.33,34.417 v2(227.33,32.385) 228.6,31.115 228.6,28.063 227.33,26.793 J2.2@227.33,23.114
RESET#: U2.1 U7.6 U13.4 U15.8 | length 183.5
  F.Cu w0.254: v1(81.788,117.475) 82.042,117.221 82.55,116.713 82.55,68.326 v1(82.169,67.945) ; v1(121.158,69.215) 121.158,74.803 123.063,76.708 123.063,85.979 121.92,87.122 v1(121.92,103.505)
  B.Cu w0.254: U13.4@71.12,76.835 72.136,76.835 72.898,76.073 72.898,69.85 74.803,67.945 v1(82.169,67.945) 100.457,67.945 101.727,69.215 U15.8@104.14,69.215 107.569,65.786 120.269,65.786 121.158,66.675 121.158,67.818 v1(121.158,69.215) ; U2.1@71.12,117.475 72.174,117.475 73.444,116.205 80.264,116.205 81.534,117.475 v1(81.788,117.475) ; v1(121.92,103.505) 123.444,103.505 ; 122.809,103.505 123.444,103.505 ; U7.6@144.78,104.775 140.081,104.775 138.811,103.505 136.525,103.505 123.698,103.505 123.444,103.505
ROM_ADDR#: U6.6 U14.1 U16.9 | length 114.8
  F.Cu w0.254: 83.947,90.043 83.947,89.027 ; v1(83.947,90.805) 83.947,89.027 ; v1(85.979,70.485) 85.598,70.866 85.598,83.731 84.874,84.455 U14.1@83.82,84.455 83.947,84.582 83.947,89.027 ; v1(129.032,92.71) 129.032,98.933 129.794,99.695 130.721,100.622 130.721,103.594 U6.6@129.54,104.775
  B.Cu w0.254: v1(83.947,90.805) 107.95,90.805 110.744,93.599 116.205,93.599 117.856,91.948 128.016,91.948 128.27,91.948 v1(129.032,92.71) ; v1(85.979,70.485) 91.821,70.485 114.439,70.485 115.709,71.755 U16.9@116.84,71.755
T/C: J2.27 U18.4 | length 68.3
  F.Cu w0.254: U18.4@147.32,69.215 149.733,66.802 149.733,46.99 144.526,41.783 144.526,39.838 144.526,37.084 v1(149.225,32.385)
  B.Cu w0.254: v1(149.225,32.385) 150.368,32.385 152.146,34.163 152.908,34.163 162.052,34.163 v2(163.83,32.385) 165.1,31.115 165.1,28.063 163.83,26.793 J2.27@163.83,23.114
pads on no net: J2.5 J2.7 J2.9 J2.30 RN2.4 U3.5 U4.7 U4.9 U4.10 U4.11 U4.12 U4.13 U4.14 U5.11 U6.3 U6.11 U8.2 U8.4 U8.16 U8.18 U13.8 U18.3 U18.5 U18.15 U18.17 U21.6 U21.7
copper on no net: | length 41.3
  B.Cu w0.254: 156.21,23.114 156.21,26.797 157.48,28.067 157.48,31.115 v2(156.21,32.385) ; 209.55,23.114 209.55,26.793 210.82,28.063 210.82,31.115 v2(209.55,32.385) ; 214.63,23.114 214.63,26.793 215.9,28.063 215.9,31.115 v2(214.63,32.385) ; 219.71,23.114 219.71,26.793 220.98,28.063 220.98,31.115 v2(219.71,32.385)

## Polygon pours and split planes (outlines as drawn)
GND on In1.Cu "In1.Cu-GND" (solid, remove dead copper, pour order 0): 50.8,27.305 50.8,125.095 254,125.095 254,27.305 232.41,27.305 229.87,27.305 226.06,27.305 157.48,27.305 153.67,27.305 151.13,27.305
+5V on In2.Cu "In2.Cu-+5V" (solid, remove dead copper, pour order 1): 50.8,27.305 50.8,125.095 254,125.095 254,27.305 232.41,27.305 229.87,27.305 226.06,27.305 161.29,27.305 157.48,27.305 151.13,27.305
GND on F.Cu "F.Cu-GND" (solid, remove dead copper, pour order 2): 238.76,27.559 253.746,27.559 253.746,97.155 240.284,97.155 240.284,90.043 244.856,90.043 245.364,89.535 245.364,36.703 244.094,35.433 238.76,35.433

## Keep-outs
Edge.Cuts:
  lines w0.15: 50.8,27.305 151.13,27.305 ; 50.8,27.305 50.8,125.095 ; 50.8,27.305 151.13,27.305 ; 50.8,27.305 50.8,125.095 ; 50.8,125.095 254,125.095 ; 50.8,125.095 254,125.095 ; 151.13,20.955 151.13,27.305 ; 151.13,20.955 152.4,19.685 ; 151.13,20.955 151.13,27.305 ; 151.13,20.955 152.4,19.685 ; 152.4,19.685 231.14,19.685 ; 152.4,19.685 231.14,19.685 ; 231.14,19.685 232.41,20.955 ; 231.14,19.685 232.41,20.955 ; 232.41,20.955 232.41,27.305 ; 232.41,20.955 232.41,27.305 ; 232.41,27.305 254,27.305 ; 232.41,27.305 254,27.305 ; 254,27.305 254,125.095 ; 254,27.305 254,125.095

## Silkscreen, mask and mechanical layers (free items; w line width, h text height)
F.SilkS:
  text "TUBETIME.US" at 239.912,122.047 h1.52
  text "REPLICA" at 241.9,120.015 h1.52
  text "+" at 67.637,103.832 h1.5
  text "+" at 227.657,39.062 h1.5
  text "EXTENDER" at 116.254,29.799 h2.03
F.Mask:
  dashed: 232.41,20.955 231.14,19.685 152.4,19.685 151.13,20.955 151.13,27.305 232.41,27.305
B.Mask:
  dashed: 232.41,20.955 231.14,19.685 152.4,19.685 151.13,20.955 151.13,27.305 232.41,27.305
Dwgs.User:
  circle w0.2: c282.829,94.107 r1.524
  circle w0.2: c282.829,30.607 r1.524
  lines w0.2: 255.397,30.607 274.193,30.607 284.099,30.607 ; 255.397,94.107 284.734,94.107 ; 277.622,62.344 277.622,36.182 ccw(c280.975,36.182) 281.559,32.881 285.394,33.668 ccw(c284.683,36.944) 288.036,36.944 ; 277.622,62.357 277.622,88.519 cw(c280.975,88.519) 281.559,91.821 285.394,91.034 cw(c284.683,87.757) 288.036,87.757 288.036,36.957 ; 282.067,62.357 283.591,62.357 ; 282.829,15.367 282.829,95.885

## Dimensions
50.8,126.365 to 254,126.365 on Dwgs.User
49.53,125.095 to 49.53,19.685 on Dwgs.User
40.64,19.685 to 40.64,125.095 on Dwgs.User
254,132.715 to 50.8,132.715 on Dwgs.User